# EAGLE board P1001-001-003-320 - Controller (EAGLE 9.4.2), part 1 of 4
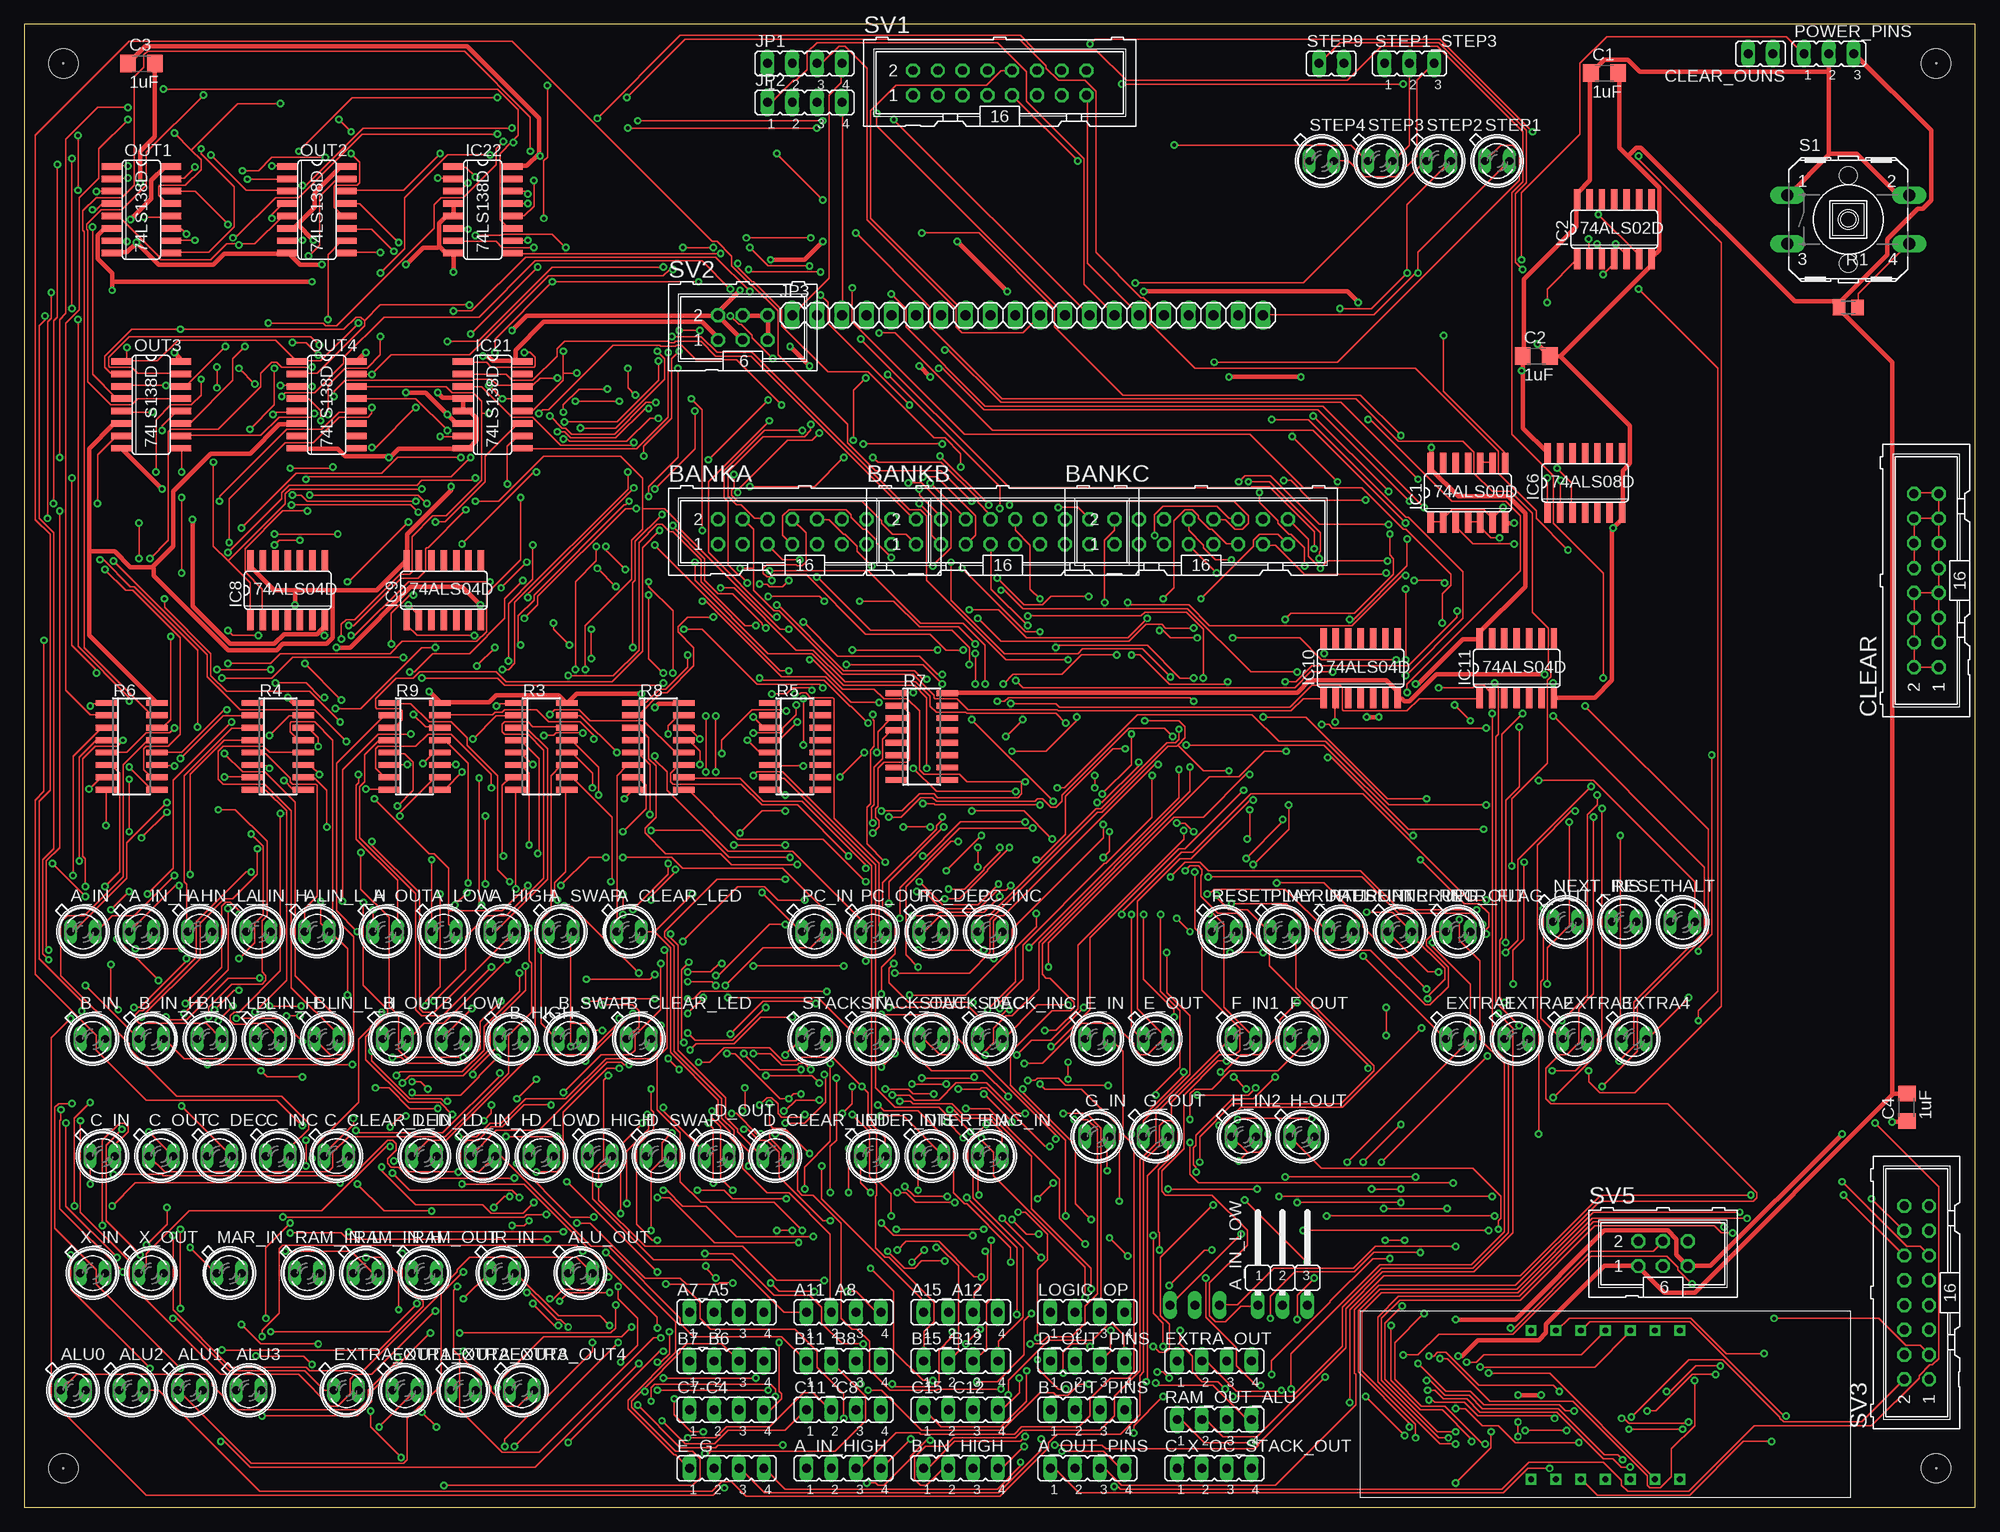
[diagram p0: board, top side]
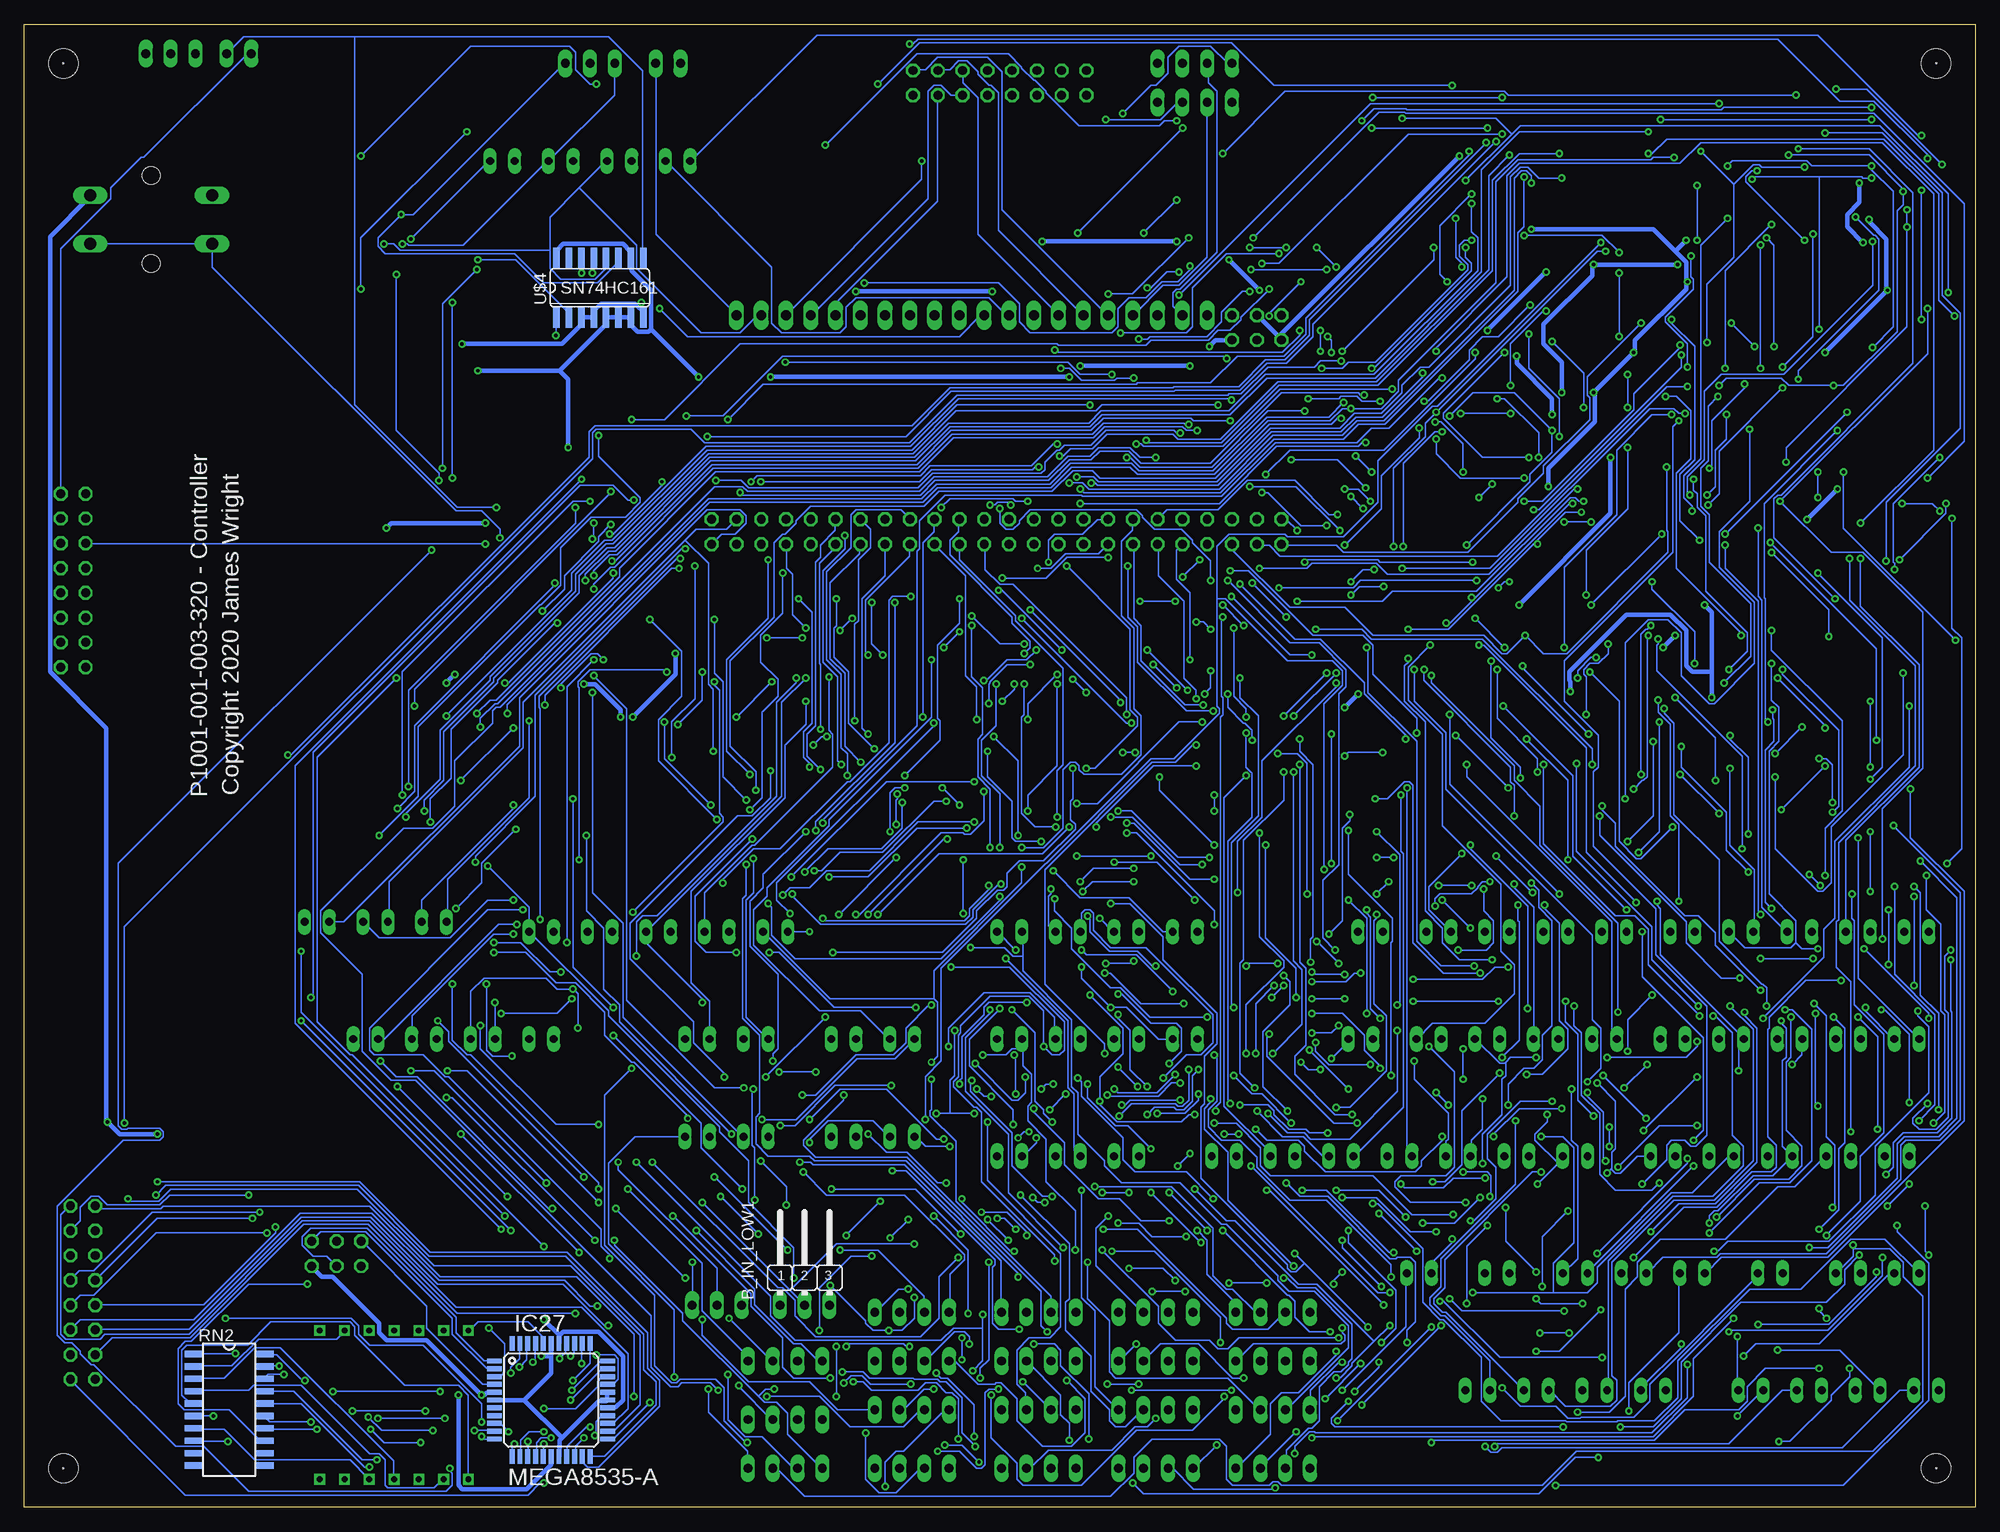
[diagram p1: board, bottom side, seen from below]

Size 200 x 152 mm. Coordinates in mm from the lower left corner, seen from the top.
Outline: 0,0 200,0 200,152 0,152 0,0
Copper layers (1*16): Top 0.035mm / dielectric 1.5mm / Bottom 0.035mm
Design rules "default *": minimum track width 6mil, minimum drill 0.35mm, track to track 6mil, track to pad 6mil, pad to pad 6mil, via to via 6mil, smd to smd 6mil, copper to edge 40mil, drill to drill 6mil, minimum pad ring 10mil, minimum via ring 8mil, stop-mask expansion 4mil, vias tented up to drill 0mil, thermal gap 10mil
Net classes: 1 power: width 0.457 mm
Holes 0.12 mm at 4,4 196,148 4,148 196,4
Holes 3 mm at 4,148 4,4 196,4 196,148

## Footprints (pad centres in the part's own frame; a part is rotated, then mirrored left to right if it is on the bottom)
JP4 = drill 0.914 long: 1 -3.81,0; 2 -1.27,0; 3 1.27,0; 4 3.81,0
SFH482 = drill 0.813 long: A -1.27,0; K 1.27,0
JP2W = drill 0.914 long: 1 -2.54,-1.27; 2 0,-1.27; 3 2.54,-1.27
ML16 = drill 0.914 octagon: 1 -8.89,-1.27; 2 -8.89,1.27; 3 -6.35,-1.27; 4 -6.35,1.27; 5 -3.81,-1.27; 6 -3.81,1.27; 7 -1.27,-1.27; 8 -1.27,1.27; 9 1.27,-1.27; 10 1.27,1.27; 11 3.81,-1.27; 12 3.81,1.27; 13 6.35,-1.27; 14 6.35,1.27; 15 8.89,-1.27; 16 8.89,1.27
C1206 = smd 1.6 x 1.8: 1 -1.4,0; 2 1.4,0
JP1 = drill 0.914 long: 1 0,-1.27; 2 0,1.27
SO14 = smd 0.66 x 2.032: 1 -3.81,-3.073; 2 -2.54,-3.073; 3 -1.27,-3.073; 4 0,-3.073; 5 1.27,-3.073; 6 2.54,-3.073; 7 3.81,-3.073; 8 3.81,3.073; 9 2.54,3.073; 10 1.27,3.073; 11 0,3.073; 12 -1.27,3.073; 13 -2.54,3.073; 14 -3.81,3.073
SO16 = smd 0.66 x 2.032: 1 -4.445,-3.073; 2 -3.175,-3.073; 3 -1.905,-3.073; 4 -0.635,-3.073; 5 0.635,-3.073; 6 1.905,-3.073; 7 3.175,-3.073; 8 4.445,-3.073; 9 4.445,3.073; 10 3.175,3.073; 11 1.905,3.073; 12 0.635,3.073; 13 -0.635,3.073; 14 -1.905,3.073; 15 -3.175,3.073; 16 -4.445,3.073
TQFP44 = smd 1.5 x 0.5: 1 -5.8,4; 2 -5.8,3.2; 3 -5.8,2.4; 4 -5.8,1.6; 5 -5.8,0.8; 6 -5.8,0; 7 -5.8,-0.8; 8 -5.8,-1.6; 9 -5.8,-2.4; 10 -5.8,-3.2; 11 -5.8,-4; 23 5.8,-4; 24 5.8,-3.2; 25 5.8,-2.4; 26 5.8,-1.6; 27 5.8,-0.8; 28 5.8,0; 29 5.8,0.8; 30 5.8,1.6; 31 5.8,2.4; 32 5.8,3.2; 33 5.8,4 | smd 0.5 x 1.5: 12 -4,-5.8; 13 -3.2,-5.8; 14 -2.4,-5.8; 15 -1.6,-5.8; 16 -0.8,-5.8; 17 0,-5.8; 18 0.8,-5.8; 19 1.6,-5.8; 20 2.4,-5.8; 21 3.2,-5.8; 22 4,-5.8; 34 4,5.8; 35 3.2,5.8; 36 2.4,5.8; 37 1.6,5.8; 38 0.8,5.8; 39 0,5.8; 40 -0.8,5.8; 41 -1.6,5.8; 42 -2.4,5.8; 43 -3.2,5.8; 44 -4,5.8
1X20 = drill 1.016 long: 1 -24.13,0; 2 -21.59,0; 3 -19.05,0; 4 -16.51,0; 5 -13.97,0; 6 -11.43,0; 7 -8.89,0; 8 -6.35,0; 9 -3.81,0; 10 -1.27,0; 11 1.27,0; 12 3.81,0; 13 6.35,0; 14 8.89,0; 15 11.43,0; 16 13.97,0; 17 16.51,0; 18 19.05,0; 19 21.59,0; 20 24.13,0
JP2 = drill 0.914 long: 1 -2.54,0; 2 0,0; 3 2.54,0
M0805 = smd 1.3 x 1.6: 1 -0.95,0; 2 0.95,0
SO16' = smd 0.6 x 2.2: 1 -4.445,-2.6; 2 -3.175,-2.6; 3 -1.905,-2.6; 4 -0.635,-2.6; 5 0.635,-2.6; 6 1.905,-2.6; 7 3.175,-2.6; 8 4.445,-2.6; 9 4.445,2.6; 10 3.175,2.6; 11 1.905,2.6; 12 0.635,2.6; 13 -0.635,2.6; 14 -1.905,2.6; 15 -3.175,2.6; 16 -4.445,2.6
SOMC20 = smd 1.91 x 0.64: 1 -3.62,5.715; 2 -3.62,4.445; 3 -3.62,3.175; 4 -3.62,1.905; 5 -3.62,0.635; 6 -3.62,-0.635; 7 -3.62,-1.905; 8 -3.62,-3.175; 9 -3.62,-4.445; 10 -3.62,-5.715; 11 3.62,-5.715; 12 3.62,-4.445; 13 3.62,-3.175; 14 3.62,-1.905; 15 3.62,-0.635; 16 3.62,0.635; 17 3.62,1.905; 18 3.62,3.175; 19 3.62,4.445; 20 3.62,5.715
B3F-40XX = drill 1.194 long: 1 -6.248,2.489; 2 6.248,2.489; 3 -6.248,-2.489; 4 6.248,-2.489 | hole 1.803: 0,-4.496; 0,4.496
ML6 = drill 0.914 octagon: 1 -2.54,-1.27; 2 -2.54,1.27; 3 0,-1.27; 4 0,1.27; 5 2.54,-1.27; 6 2.54,1.27
4-DIGIT-7-SEGMENT = drill 0.6 square: PIN1 17.48,1.88; PIN2 20.02,1.88; PIN3 22.56,1.88; PIN4 25.1,1.88; PIN5 27.64,1.88; PIN6 30.18,1.88; PIN7 32.72,1.88; PIN8 32.72,17.12; PIN9 30.18,17.12; PIN10 27.64,17.12; PIN11 25.1,17.12; PIN12 22.56,17.12; PIN13 20.02,17.12; PIN14 17.48,17.12

## Placement (x,y rotation side)
A7_A5  [JP4]  72,20 0 top
A11_A8  [JP4]  84,20 0 top
A15_A12  [JP4]  96,20 0 top
A_CLEAR_LED  [SFH482]  62,59 0 top
A_HIGH  [SFH482]  49,59 0 top
A_IN  [SFH482]  6,59 0 top
A_IN_H_H  [SFH482]  12,59 0 top
A_IN_H_L  [SFH482]  24,59 0 top
A_IN_HIGH  [JP4]  84,4 0 top
A_IN_L_H  [SFH482]  30,59 0 top
A_IN_L_L  [SFH482]  18,59 0 top
A_IN_LOW  [JP2W]  129,22 0 top
A_LOW  [SFH482]  43,59 0 top
A_OUT  [SFH482]  37,59 0 top
A_OUT_PINS  [JP4]  109,4 0 top
A_SWAP  [SFH482]  55,59 0 top
ALU0  [SFH482]  5,12 0 top
ALU1  [SFH482]  17,12 0 top
ALU2  [SFH482]  11,12 0 top
ALU3  [SFH482]  23,12 0 top
ALU_OUT  [SFH482]  57,24 0 top
B7_B6  [JP4]  72,15 0 top
B11_B8  [JP4]  84,15 0 top
B15_B12  [JP4]  96,15 0 top
B_CLEAR_LED  [SFH482]  63,48 0 top
B_HIGH  [SFH482]  50,48 0 top
B_IN  [SFH482]  7,48 0 top
B_IN_H_H  [SFH482]  13,48 0 top
B_IN_H_L  [SFH482]  25,48 0 top
B_IN_HIGH  [JP4]  96,4 0 top
B_IN_L_H  [SFH482]  31,48 0 top
B_IN_L_L  [SFH482]  19,48 0 top
B_IN_LOW1  [JP2W]  120,22 0 bottom
B_LOW  [SFH482]  44,48 0 top
B_OUT  [SFH482]  38,48 0 top
B_OUT_PINS  [JP4]  109,10 0 top
B_SWAP  [SFH482]  56,48 0 top
BANKA  [ML16]  80,100 0 top
BANKB  [ML16]  100.32,100 0 top
BANKC  [ML16]  120.64,100 0 top
C1  1uF  [C1206]  162,147 0 top
C2  1uF  [C1206]  155,118 0 top
C3  1uF  [C1206]  12,148 0 top
C4  1uF  [C1206]  193,41 90 top
C7-C4  [JP4]  72,10 0 top
C11_C8  [JP4]  84,10 0 top
C15_C12  [JP4]  96,10 0 top
C_CLEAR_LED  [SFH482]  32,36 0 top
C_DEC  [SFH482]  20,36 0 top
C_IN  [SFH482]  8,36 0 top
C_INC  [SFH482]  26,36 0 top
C_OUT  [SFH482]  14,36 0 top
C_X_OC_STACK_OUT  [JP4]  122,4 0 top
CLEAR  [ML16]  195,95 90 top
CLEAR_OUNS  [JP1]  178,149 90 top
D_CLEAR_LED  [SFH482]  77,36 0 top
D_HIGH  [SFH482]  59,36 0 top
D_IN_H  [SFH482]  47,36 0 top
D_IN_L  [SFH482]  41,36 0 top
D_LOW  [SFH482]  53,36 0 top
D_OUT  [SFH482]  71,36 0 top
D_OUT_PINS  [JP4]  109,15 0 top
D_SWAP  [SFH482]  65,36 0 top
E_G  [JP4]  72,4 0 top
E_IN  [SFH482]  110,48 0 top
E_OUT  [SFH482]  116,48 0 top
EXTRA1  [SFH482]  147,48 0 top
EXTRA2  [SFH482]  153,48 0 top
EXTRA3  [SFH482]  159,48 0 top
EXTRA4  [SFH482]  165,48 0 top
EXTRA_OUT  [JP4]  122,15 0 top
EXTRA_OUT1  [SFH482]  33,12 0 top
EXTRA_OUT2  [SFH482]  39,12 0 top
EXTRA_OUT3  [SFH482]  45,12 0 top
EXTRA_OUT4  [SFH482]  51,12 0 top
F_IN1  [SFH482]  125,48 0 top
F_OUT  [SFH482]  131,48 0 top
FLAG_IN  [SFH482]  99,36 0 top
G_IN  [SFH482]  110,38 0 top
G_OUT  [SFH482]  116,38 0 top
H-OUT  [SFH482]  131,38 0 top
H_IN2  [SFH482]  125,38 0 top
HALT  [SFH482]  170,60 0 top
IC1  74ALS00D  [SO14]  148,104 0 top
IC2  74ALS02D  [SO14]  163,131 0 top
IC6  74ALS08D  [SO14]  160,105 0 top
IC8  74ALS04D  [SO14]  27,94 0 top
IC9  74ALS04D  [SO14]  43,94 0 top
IC10  74ALS04D  [SO14]  137,86 0 top
IC11  74ALS04D  [SO14]  153,86 0 top
IC21  74LS138D  [SO16]  48,113 270 top
IC22  74LS138D  [SO16]  47,133 270 top
IC27  MEGA8535-A  [TQFP44]  146,11 0 bottom
INTER_DIS  [SFH482]  87,36 0 top
INTER_EN  [SFH482]  93,36 0 top
INTR_FLAG_OUT  [SFH482]  147,59 0 top
INTR_REG_OUT  [SFH482]  141,59 0 top
IR_IN  [SFH482]  49,24 0 top
JP1  [JP4]  80,148 0 top
JP2  [JP4]  80,144 0 top
JP3  [1X20]  102.86,122.19 0 top
LOGIC_OP  [JP4]  109,20 0 top
MAR_IN  [SFH482]  21,24 0 top
NEXT_INS  [SFH482]  158,60 0 top
OUT1  74LS138D  [SO16]  12,133 270 top
OUT2  74LS138D  [SO16]  30,133 270 top
OUT3  74LS138D  [SO16]  13,113 270 top
OUT4  74LS138D  [SO16]  31,113 270 top
PAUSE_INERUPT  [SFH482]  135,59 0 top
PC_DEC  [SFH482]  93,59 0 top
PC_IN  [SFH482]  81,59 0 top
PC_INC  [SFH482]  99,59 0 top
PC_OUT  [SFH482]  87,59 0 top
PLAY_INTERUPT  [SFH482]  129,59 0 top
POWER_PINS  [JP2]  185,149 0 top
R1  [M0805]  187,123 0 top
R3  [SO16']  53,78 270 top
R4  [SO16']  26,78 270 top
R5  [SO16']  79,78 270 top
R6  [SO16']  11,78 270 top
R7  [SO16']  92,79 270 top
R8  [SO16']  65,78 270 top
R9  [SO16']  40,78 270 top
RAM_IN_H  [SFH482]  35,24 0 top
RAM_IN_L  [SFH482]  29,24 0 top
RAM_OUT  [SFH482]  41,24 0 top
RAM_OUT_ALU  [JP4]  122,9 0 top
RESET  [SFH482]  164,60 0 top
RESET_INERUPT1  [SFH482]  123,59 0 top
RN2  [SOMC20]  179,10 0 bottom
S1  [B3F-40XX]  187,132 0 top
STACK_DEC  [SFH482]  93,48 0 top
STACK_IN  [SFH482]  81,48 0 top
STACK_INC  [SFH482]  99,48 0 top
STACK_OUT  [SFH482]  87,48 0 top
STEP1  [SFH482]  151,138 0 top
STEP1_STEP3  [JP2]  142,148 0 top
STEP2  [SFH482]  145,138 0 top
STEP3  [SFH482]  139,138 0 top
STEP4  [SFH482]  133,138 0 top
STEP9  [JP1]  134,148 270 top
SV1  [ML16]  100,146 0 top
SV2  [ML6]  73.65,120.92 0 top
SV3  [ML16]  194,22 90 top
SV5  [ML6]  168,26 0 top
U$1  4-DIGIT-7-SEGMENT  [4-DIGIT-7-SEGMENT]  137,1 0 top
U$4  SN74HC161  [SO16]  141,125 0 bottom
X_IN  [SFH482]  7,24 0 top
X_OUT  [SFH482]  13,24 0 top

## Library data of the parts
A7_A5 A11_A8 A15_A12 A_IN_HIGH A_IN_LOW A_OUT_PINS B7_B6 B11_B8 B15_B12 B_IN_HIGH B_IN_LOW1 B_OUT_PINS C7-C4 C11_C8 C15_C12 C_X_OC_STACK_OUT CLEAR_OUNS D_OUT_PINS E_G EXTRA_OUT JP1 JP2 LOGIC_OP POWER_PINS RAM_OUT_ALU STEP1_STEP3 STEP9 = jumper
A_CLEAR_LED A_HIGH A_IN A_IN_H_H A_IN_H_L A_IN_L_H A_IN_L_L A_LOW A_OUT A_SWAP ALU0 ALU1-ALU3 ALU_OUT B_CLEAR_LED B_HIGH B_IN B_IN_H_H B_IN_H_L B_IN_L_H B_IN_L_L B_LOW B_OUT B_SWAP C_CLEAR_LED C_DEC C_IN C_INC C_OUT D_CLEAR_LED D_HIGH D_IN_H D_IN_L D_LOW D_OUT D_SWAP E_IN E_OUT EXTRA1-EXTRA4 EXTRA_OUT1-EXTRA_OUT4 F_IN1 F_OUT FLAG_IN G_IN G_OUT H-OUT H_IN2 HALT INTER_DIS INTER_EN INTR_FLAG_OUT INTR_REG_OUT IR_IN MAR_IN NEXT_INS PAUSE_INERUPT PC_DEC PC_IN PC_INC PC_OUT PLAY_INTERUPT RAM_IN_H RAM_IN_L RAM_OUT RESET RESET_INERUPT1 STACK_DEC STACK_IN STACK_INC STACK_OUT STEP1-STEP4 X_IN X_OUT = led
BANKA BANKB BANKC CLEAR SV1-SV3 SV5 = con-harting-ml; OC_FARNELL: unknown; OC_NEWARK: unknown
C1-C4 = rcl; SPICEPREFIX: C
IC1 IC2 IC6 IC8-IC11 IC21 IC22 OUT1-OUT4 = 74xx-us
IC27 = atmel; MPN: ATMEGA8535-16AU; OC_FARNELL: 1528437; OC_NEWARK: 01M6908
JP3 = pinhead
R1 = rcl; SPICEPREFIX: R
R3-R9 = resistor-bourns; OC_FARNELL: unknown; OC_NEWARK: unknown
RN2 = resistor-dil; OC_FARNELL: unknown; OC_NEWARK: unknown
S1 = switch-omron; MF: OMRON COMPONENTS USA; MPN: B3F-4000; OC_FARNELL: 176434; OC_NEWARK: 36K3105
U$1 = ADAFRUIT
U$4 = 16bit

## Nets
!CLEAR: CLEAR_OUNS.1 IC1.1 IC1.2 IC1.6 U$4.9
A: IC27.37 RN2.20
B: IC27.36 RN2.19
C: IC27.35 RN2.18
CLEAR: CLEAR.1 CLEAR.2 CLEAR.3 CLEAR.4 CLEAR.5 CLEAR.6 CLEAR.7 CLEAR.8 CLEAR.9 CLEAR.10 CLEAR.11 CLEAR.12 CLEAR.13 CLEAR.14 CLEAR.15 CLEAR.16 CLEAR_OUNS.2 IC1.3
CLK: POWER_PINS.1 U$4.2
D: IC27.34 RN2.17
DATAA0: BANKA.1 OUT1.1 OUT2.1 OUT3.1 OUT4.1
DATAA1: BANKA.2 OUT1.2 OUT2.2 OUT3.2 OUT4.2
DATAA2: BANKA.3 OUT1.3 OUT2.3 OUT3.3 OUT4.3
DATAA3: BANKA.4 IC8.1 IC10.1 OUT1.4 OUT3.4
DATAA4: BANKA.5 IC9.1 IC11.1 OUT1.5 OUT2.5
DATAA5: A7_A5.2 BANKA.6 EXTRA1.K
DATAA6: A7_A5.3 BANKA.7 EXTRA2.K
DATAA7: A7_A5.4 BANKA.8 EXTRA3.K
DATAA8: A11_A8.1 BANKA.9 EXTRA4.A
DATAA9: A11_A8.2 A_CLEAR_LED.K BANKA.10
DATAA10: A11_A8.3 B_CLEAR_LED.K BANKA.11
DATAA11: A11_A8.4 BANKA.12 C_CLEAR_LED.K
DATAA12: A15_A12.1 BANKA.13 D_CLEAR_LED.K
DATAA13: A15_A12.2 BANKA.14 RESET_INERUPT1.K
DATAA14: A15_A12.3 BANKA.15 PAUSE_INERUPT.K
DATAA15: A15_A12.4 BANKA.16 PLAY_INTERUPT.K
DATAB0: BANKB.1 IC21.1
DATAB1: BANKB.2 IC21.2
DATAB2: BANKB.3 IC21.3
DATAB3: BANKB.4 IC22.1
DATAB4: BANKB.5 IC22.2
DATAB5: BANKB.6 IC22.3
DATAB6: B7_B6.3 BANKB.7 C_IN.K
DATAB7: B7_B6.4 BANKB.8 D_IN_L.K
DATAB8: B11_B8.1 BANKB.9 D_IN_H.K
DATAB9: B11_B8.2 BANKB.10 X_IN.K
DATAB10: B11_B8.3 BANKB.11 IR_IN.K
DATAB11: B11_B8.4 BANKB.12 MAR_IN.K
DATAB12: B15_B12.1 BANKB.13 PC_IN.K
DATAB13: B15_B12.2 BANKB.14 STACK_IN.K
DATAB14: B15_B12.3 BANKB.15 RAM_IN_L.K
DATAB15: B15_B12.4 BANKB.16 RAM_IN_H.K
DATAC0: ALU0.K BANKC.1 LOGIC_OP.4
DATAC1: ALU1.K BANKC.2 LOGIC_OP.3
DATAC2: ALU2.K BANKC.3 LOGIC_OP.2
DATAC3: ALU3.K BANKC.4 LOGIC_OP.1
DATAC4: BANKC.5 C7-C4.1 PC_DEC.A
DATAC5: BANKC.6 C7-C4.2 PC_INC.A
DATAC6: BANKC.7 C7-C4.3 STACK_INC.A
DATAC7: BANKC.8 C7-C4.4 STACK_DEC.A
DATAC8: BANKC.9 C11_C8.1 C_INC.A
DATAC9: BANKC.10 C11_C8.2 C_DEC.A
DATAC10: BANKC.11 C11_C8.3 FLAG_IN.A
DATAC11: BANKC.12 C11_C8.4 INTER_EN.A
DATAC12: BANKC.13 C15_C12.1 INTER_DIS.A
DATAC13: BANKC.14 C15_C12.2 RESET.A
DATAC14: BANKC.15 C15_C12.3 HALT.A
DATAC15: BANKC.16 C15_C12.4 NEXT_INS.A
DIG0: IC27.40 U$1.PIN14
DIG1: IC27.41 U$1.PIN11
DIG2: IC27.42 U$1.PIN10
DIG3: IC27.43 U$1.PIN6
DP: IC27.30 RN2.13
E: IC27.33 RN2.16
EXTERN_BUS0: IC27.9 SV3.1
EXTERN_BUS1: IC27.10 SV3.2
EXTERN_BUS2: IC27.11 SV3.3
EXTERN_BUS3: IC27.12 SV3.4
EXTERN_BUS4: IC27.13 SV3.5
EXTERN_BUS5: IC27.14 SV3.6
EXTERN_BUS6: IC27.15 SV3.7
EXTERN_BUS7: IC27.16 SV3.8
EXTERN_BUS8: IC27.19 SV3.9
EXTERN_BUS9: IC27.20 SV3.10
EXTERN_BUS10: IC27.21 SV3.11
EXTERN_BUS11: IC27.22 SV3.12
EXTERN_BUS12: IC27.23 SV3.13
EXTERN_BUS13: IC27.24 SV3.14
EXTERN_BUS14: IC27.25 SV3.15
EXTERN_BUS15: IC27.26 SV3.16
F: IC27.32 RN2.15
FIRST_STEP: IC6.3 STEP9.1
G: IC27.31 RN2.14
GND [power]: C1.2 C2.2 C3.2 C4.2 IC1.7 IC2.7 IC6.7 IC8.7 IC9.7 IC10.7 IC11.7 IC21.4 IC21.5 IC21.8 IC22.4 IC22.5 IC22.8 IC27.6 IC27.18 IC27.28 IC27.29 IC27.39 OUT1.8 OUT2.8 OUT3.8 OUT4.8 POWER_PINS.3 R1.1 R7.16 SV2.2 SV2.3 SV5.1 U$4.3 U$4.4 U$4.8
IN_BUS0: IC2.2 JP3.20 STEP1.K STEP9.2 U$4.14
IN_BUS1: IC2.3 JP3.10 STEP1_STEP3.1 STEP2.K U$4.13
IN_BUS2: IC2.5 JP3.19 STEP1_STEP3.2 STEP3.K U$4.12
IN_BUS3: IC2.6 JP3.9 STEP1_STEP3.3 STEP4.K U$4.11
IN_BUS4: JP3.18 SV1.9
IN_BUS5: JP3.8 SV1.10
IN_BUS6: JP3.17 SV1.11
IN_BUS7: JP3.7 SV1.12
IN_BUS8: JP3.16 SV1.13
IN_BUS9: JP3.6 SV1.14
IN_BUS10: JP3.15 SV1.15
IN_BUS11: JP3.5 SV1.16
IN_BUS12: JP2.1 JP3.14
IN_BUS13: JP2.2 JP3.4
IN_BUS14: JP2.3 JP3.13
IN_BUS15: JP2.4 JP3.3
IN_BUS16: JP1.1 JP3.12
IN_BUS17: JP1.2 JP3.2
IN_BUS18: JP1.3 JP3.11
IN_BUS19: JP1.4 JP3.1
N$1: IC1.4 IC1.5 R1.2 S1.3 S1.4
N$2: EXTRA1.A R8.1
N$3: EXTRA2.A R8.2
N$4: R8.13 X_IN.A
N$5: EXTRA4.K R5.3
N$6: EXTRA3.A R8.3
N$7: A_CLEAR_LED.A R8.6
N$8: C_CLEAR_LED.A R8.8
N$9: B_CLEAR_LED.A R8.7
N$10: R8.9 RESET_INERUPT1.A
N$11: PAUSE_INERUPT.A R8.10
N$12: PLAY_INTERUPT.A R8.11
N$13: C_IN.A R8.12
N$14: D_IN_L.A R8.15
N$15: D_IN_H.A R8.14
N$16: PC_DEC.K R6.2
N$17: PC_INC.K R6.1
N$18: R6.8 RAM_IN_H.A
N$19: R6.7 RAM_IN_L.A
N$20: R6.6 STACK_IN.A
N$21: PC_IN.A R6.5
N$22: MAR_IN.A R6.4
N$23: IR_IN.A R6.3
N$24: INTER_DIS.K R5.7
N$25: R6.15 STACK_INC.K
N$26: R6.14 STACK_DEC.K
N$27: C_INC.K R6.13
N$28: C_DEC.K R6.12
N$29: INTER_EN.K R5.8
N$30: FLAG_IN.K R6.11
N$31: A_IN.K A_IN_LOW.1 IC21.14
N$32: A_IN_L_L.K A_IN_LOW.2 IC21.13
N$33: A_IN_H_H.K A_IN_LOW.3 IC21.12
N$34: A_IN_HIGH.1 A_IN_L_H.K IC21.11
N$35: A_IN_H_L.K A_IN_HIGH.2 IC21.10
N$36: A_IN_HIGH.3 E_IN.K IC21.9
N$38: A_IN_HIGH.4 G_IN.K IC21.7
N$39: G_IN.A R4.8
N$40: E_IN.A R4.7
N$41: A_IN_H_L.A R4.6
N$42: D_CLEAR_LED.A R8.5
N$43: IC1.8 U$4.1
N$44: B_IN_HIGH.1 H_IN2.A IC22.7
N$45: B_IN_HIGH.2 F_IN1.A IC22.9
N$46: B_IN_H_L.A B_IN_HIGH.3 IC22.10
N$47: B_IN_HIGH.4 B_IN_L_H.A IC22.11
N$48: B_IN_H_H.A B_IN_LOW1.1 IC22.12
N$49: B_IN_L_L.A B_IN_LOW1.2 IC22.13
N$50: A_OUT.K A_OUT_PINS.1 OUT1.15
N$51: B_IN.A B_IN_LOW1.3 IC22.14
N$52: H_IN2.K R4.9
N$53: F_IN1.K R4.10
N$54: B_IN_H_L.K R4.11
N$55: R9.14 STEP2.A
N$56: A_LOW.K A_OUT_PINS.2 OUT1.14
N$57: A_HIGH.K A_OUT_PINS.3 OUT1.13
N$58: A_OUT_PINS.4 A_SWAP.K OUT1.12
N$59: R5.6 RESET.K
N$60: HALT.K R5.5
N$61: IC2.4 IC6.2
N$62: IC2.1 IC6.1
N$63: NEXT_INS.K R5.4
N$64: A_IN_L_H.A R4.5
N$65: A_IN_H_H.A R4.4
N$66: A_IN_L_L.A R4.3
N$67: ALU0.A R7.4
N$68: ALU1.A R7.3
N$69: ALU2.A R7.1
N$70: ALU3.A R7.2
N$71: A_IN.A R4.2
N$72: IC22.15
N$73: B_IN_L_H.K R4.12
N$74: B_IN_H_H.K R4.13
N$75: B_OUT.K B_OUT_PINS.1 OUT1.11
N$76: B_LOW.K B_OUT_PINS.2 OUT1.10
N$77: B_HIGH.K B_OUT_PINS.3 OUT1.9
N$78: B_OUT_PINS.4 B_SWAP.K OUT1.7
N$79: C_OUT.K D_OUT_PINS.4 OUT2.15
N$80: D_OUT.K D_OUT_PINS.3 OUT2.14
N$81: D_LOW.K D_OUT_PINS.2 OUT2.13
N$82: D_HIGH.K D_OUT_PINS.1 OUT2.12
N$83: C_X_OC_STACK_OUT.4 D_SWAP.K OUT2.11
N$84: C_X_OC_STACK_OUT.3 OUT2.10 X_OUT.K
N$85: C_X_OC_STACK_OUT.2 OUT2.9 PC_OUT.K
N$86: C_X_OC_STACK_OUT.1 OUT2.7 STACK_OUT.K
N$87: C_OUT.A R3.9
N$88: D_OUT.A R3.10
N$89: B_SWAP.A R3.8
N$90: B_HIGH.A R3.7
N$91: B_LOW.A R3.6
N$92: B_OUT.A R3.5
N$93: A_SWAP.A R3.4
N$94: A_HIGH.A R3.3
N$95: A_LOW.A R3.2
N$96: A_OUT.A R3.1
N$97: D_LOW.A R3.11
N$98: D_HIGH.A R3.12
N$99: PC_OUT.A R3.15
N$100: D_SWAP.A R3.13
N$101: R3.14 X_OUT.A
N$102: OUT3.15 RAM_OUT.K RAM_OUT_ALU.1
N$103: INTR_REG_OUT.K OUT3.14 RAM_OUT_ALU.2
N$104: INTR_FLAG_OUT.K OUT3.13 RAM_OUT_ALU.3
N$105: ALU_OUT.K OUT3.12 RAM_OUT_ALU.4
N$106: E_G.1 E_OUT.K OUT3.11
N$107: E_G.2 F_OUT.K OUT3.10
N$108: E_G.3 G_OUT.K OUT3.9
N$109: E_G.4 H-OUT.K OUT3.7
N$110: R9.1 STACK_OUT.A
N$111: R9.2 RAM_OUT.A
N$112: G_OUT.A R9.8
N$113: H-OUT.A R9.9
N$114: EXTRA_OUT1.A R9.10
N$115: EXTRA_OUT2.A R9.11
N$116: INTR_REG_OUT.A R9.3
N$117: INTR_FLAG_OUT.A R9.4
N$118: ALU_OUT.A R9.5
N$119: IC27.1 SV5.3
N$120: IC27.3 SV5.4
N$121: IC27.2 SV5.6
N$122: IC27.4 SV5.2
N$123: RN2.1 U$1.PIN13
N$124: RN2.2 U$1.PIN9
N$125: RN2.3 U$1.PIN4
N$126: RN2.4 U$1.PIN2
N$127: RN2.5 U$1.PIN1
N$128: RN2.6 U$1.PIN12
N$129: RN2.7 U$1.PIN5
N$130: RN2.8 U$1.PIN3
N$131: R9.15 STEP1.A
N$132: B_IN_L_L.K R4.14
N$133: R6.10 STEP3.A
N$134: R6.9 STEP4.A
N$135: B_IN.K R4.15
N$136: E_OUT.A R9.6
N$137: F_OUT.A R9.7
N$138: EXTRA_OUT3.A R9.12
N$139: EXTRA_OUT4.A R9.13
N$140: EXTRA_OUT1.K EXTRA_OUT.4 OUT4.15
N$141: EXTRA_OUT2.K EXTRA_OUT.3 OUT4.14
N$142: EXTRA_OUT3.K EXTRA_OUT.2 OUT4.13
N$143: EXTRA_OUT4.K EXTRA_OUT.1 OUT4.12
N$144: IC8.2 OUT2.4
N$145: IC9.2 OUT3.5
N$146: IC10.2 OUT4.4
N$147: IC11.2 OUT4.5
NEXT_INS: IC1.9 IC1.10
VCC [power]: C1.1 C2.1 C3.1 C4.1 IC1.14 IC2.14 IC6.14 IC8.14 IC9.14 IC10.14 IC11.14 IC21.6 IC21.16 IC22.6 IC22.16 IC27.5 IC27.17 IC27.27 IC27.38 OUT1.6 OUT1.16 OUT2.6 OUT2.16 OUT3.6 OUT3.16 OUT4.6 OUT4.16 POWER_PINS.2 R3.16 R4.16 R6.16 R8.16 R9.16 S1.1 S1.2 SV2.1 SV2.4 SV2.5 SV2.6 SV5.5 U$4.5 U$4.6 U$4.7 U$4.10 U$4.16

## Tracks (layer width: path | path; a pad name or v marks a point on that pad's centre or on a via)
!CLEAR  (via drill 0.35)
  Top 0.152: IC1.1 144.25,101 145.38,101 IC1.2 145.5,101 145.5,101.38 146.38,102.25 149.62,102.25 150.5,101.38 | 150.5,101.38 150.5,101 IC1.6 150.5,101.38 | v151.62,102.5 150.5,101.38
  Bottom 0.152: 166.12,150.75 177.5,150.75 179.25,149 CLEAR_OUNS.1 | 166.12,150.75 140.12,150.75 136.62,147.25 136.62,128.12 U$4.9 | v151.62,102.5 155.62,102.5 166.12,113 166.12,150.75
A  (via drill 0.35)
  Top 0.152: v145.12,15.25 145.88,15.25 150.25,10.88 158.75,10.88 166.38,3.25 166.38,2.25 166.62,2 167.75,2 168.88,3.12 168.88,6 171.25,8.38 v171.25,13
  Bottom 0.152: v145.12,15.25 144.5,15.88 144.5,16.75 IC27.37 | v171.25,13 171.5,13 174.12,15.62 175.38,15.62 RN2.20
B  (via drill 0.35)
  Top 0.152: v144,15.5 144.5,15.5 144.88,15.88 145.75,15.88 149.12,12.5 156.75,12.5 v157.38,11.88 | v168.38,11.88 168.75,11.88 171.38,14.5 v173.88,14.5
  Bottom 0.152: v144,15.5 143.62,15.88 143.62,16.75 IC27.36 | v168.38,11.88 v157.38,11.88 | v173.88,14.5 175.38,14.5 RN2.19
C  (via drill 0.35)
  Top 0.152: v142.88,14.75 145.75,11.88 148.25,11.88 149.62,10.5 157.38,10.5 158,9.88 v158.88,9.88 | v166.38,9.88 167.25,9.88 171,13.62 v173.38,13.62
  Bottom 0.152: v142.88,14.75 142.88,16.75 IC27.35 | v166.38,9.88 v158.88,9.88 | v173.38,13.62 175,13.62 175.38,13.25 RN2.18
CLEAR  (via drill 0.35)
  Top 0.152: CLEAR.3 196.25,88.75 196.25,91.12 CLEAR.5 196.25,91.25 196.25,93.62 CLEAR.7 196.25,93.75 | 193.75,86.12 193.75,88.62 CLEAR.4 193.75,88.75 193.75,91.12 CLEAR.6 193.75,91.25 193.75,93.62 CLEAR.8 193.75,93.75 196.25,93.75 | 193.75,86.12 196.25,86.12 CLEAR.1 | 193.75,86.12 CLEAR.2 | v152.75,98.75 148.5,98.75 146.75,100.5 146.75,100.88 IC1.3 | CLEAR.10 193.75,96.38 193.75,98.75 CLEAR.12 193.75,98.88 193.75,101.25 CLEAR.14 193.75,101.38 196.25,101.38 | 196.25,93.75 196.25,96.25 CLEAR.9 196.25,96.38 196.25,98.75 CLEAR.11 196.25,98.88 196.25,101.25 CLEAR.13 196.25,101.38 | CLEAR.16 193.75,104 196.25,104 CLEAR.15 196.25,103.88 196.25,101.38
  Bottom 0.152: v152.75,98.75 193.62,98.75 CLEAR.12 | CLEAR_OUNS.2 177.12,149 187.75,138.38 188,138.38 191.12,135.25 191.12,134.12 196.25,129 196.25,104 CLEAR.15
CLK  (via drill 0.35)
  Top 0.152: v153.5,127.88 153.5,134.75 159.5,140.75 159.5,148 162.25,150.75 180.62,150.75 182.38,149 POWER_PINS.1
  Bottom 0.152: v153.5,127.88 149.62,127.88 144.25,122.5 144.25,122 U$4.2
D  (via drill 0.35)
  Top 0.152: v143.75,13 144.12,13 145.62,11.5 148.12,11.5 149.5,10.12 157.25,10.12 162,5.38 163.38,5.38 v163.88,4.88
  Bottom 0.152: IC27.34 142,14.75 v143.75,13 | v163.88,4.88 165.38,4.88 172.38,11.88 175.38,11.88 RN2.17
DATAA0  (via drill 0.35)
  Top 0.152: v10.62,137.5 9,137.5 OUT1.1 | v25.38,137.5 26.88,137.5 OUT2.1 | 10.5,117.5 13.62,117.5 15.75,119.62 25.75,119.62 27.88,117.5 OUT4.1 28,117.5 30.38,117.5 v34.25,121.38 | 10.5,117.5 10,117.5 OUT3.1 10.5,117.5 | 10.5,117.5 v10.5,118.88
  Bottom 0.152: v25.38,137.5 24.88,138 17.25,138 16.75,137.5 v10.62,137.5 10.62,137.12 8.38,134.88 8.38,121 v10.5,118.88 | v34.25,121.38 39.75,115.88 39.75,114 39.5,113.75 39.5,111.5 44.25,106.75 44.25,106 46.88,103.38 46.88,103 52,97.88 64.75,97.88 65.5,98.62 71,98.62 BANKA.1
DATAA1  (via drill 0.35)
  Top 0.152: v10.62,136.25 9,136.25 OUT1.2 | v22.88,136.12 26.88,136.12 OUT2.2 | 34.88,121.62 34.5,122 34,122 32.75,120.75 v16,120.75 11,120.75 8.25,118 8.25,116.88 8.88,116.25 9.88,116.25 OUT3.2 | 34.88,121.62 34.88,121.12 30,116.25 28,116.25 OUT4.2 | v69.5,100.12 69.5,112.5 v68.38,113.62 | v56.5,113.38 v61,113.38 | v45.62,123.25 36.5,123.25 34.88,121.62
  Bottom 0.152: v10.62,136.25 11.5,136.25 11.62,136.38 16,136.38 | 16,136.38 22.62,136.38 v22.88,136.12 | v69.5,100.12 70.62,101.25 71,101.25 BANKA.2 | v68.38,113.62 65.25,113.62 65,113.88 63.38,113.88 62.88,113.38 v61,113.38 | v56.5,113.38 56.12,113.38 51.88,117.62 51.88,118.62 50.5,120 48.88,120 v45.62,123.25 | v16,120.75 16,136.38
DATAA2  (via drill 0.35)
  Top 0.152: v14.5,115 10,115 OUT3.3 | v26.25,115 27.88,115 OUT4.3 28,114.88 v29.5,114.88 | v7.38,134.88 8.88,134.88 OUT1.3 | v19.12,138.62 22.75,135 26.88,135 OUT2.3
  Bottom 0.152: v26.25,115 25.5,115.75 19.88,115.75 19.12,115 v14.5,115 13.5,115 8,120.5 8,132.88 7.38,133.5 v7.38,134.88 7.38,135.12 10.88,138.62 v19.12,138.62 | v29.5,114.88 31.62,114.88 49,97.5 71.25,97.5 72.38,98.62 73.62,98.62 BANKA.3
DATAA3  (via drill 0.35)
  Top 0.152: v7,131.25 7,116.12 9.38,113.75 9.88,113.75 OUT3.4 | v7,133 7.38,133 8,133.62 8.88,133.62 OUT1.4 | 20.88,97 19.38,98.5 v19.38,107.12 | 20.88,97 23.12,94.75 23.12,91 IC8.1 | 74.75,96.25 74.75,100.25 73.75,101.25 BANKA.4 | 74.75,96.25 74.75,94 76.88,91.88 77.38,91.88 83.88,85.38 91.12,85.38 93.25,83.25 93.25,83 93.38,82.88 95.62,82.88 96.75,81.75 105.88,81.75 106,81.62 129.88,81.62 131.12,82.88 133.12,82.88 IC10.1 | 20.88,97 26.75,102.88 26.75,103.88 27.25,104.38 v40.75,104.38 | 74.75,96.25 v73.38,96.25
  Bottom 0.152: v7,133 v7,131.25 7,121 19.38,108.62 v19.38,107.12 | v40.75,104.38 41.12,104.38 49.88,95.62 60.25,95.62 61.38,96.75 68,96.75 68.5,96.25 v73.38,96.25
DATAA4  (via drill 0.35)
  Top 0.152: 22,129.5 23.62,129.5 26.38,132.25 26.88,132.25 OUT2.5 | 22,129.5 20.75,129.5 19.12,127.88 14,127.88 13.75,128.12 13.75,128.25 9.75,132.25 9,132.25 OUT1.5 | v46.12,89.38 40.25,89.38 39.25,90.38 39.25,90.88 IC9.1 | v101.12,82.38 105.75,82.38 106.12,82 129.75,82 132,84.25 134.88,84.25 135.12,84 135.12,81.75 135.25,81.62 141.75,81.62 143,82.88 149.12,82.88 IC11.1 | v96.88,86.38 96.88,88.12 95.12,89.88 86.75,89.88 v81.25,95.38 | v79.5,97.12 77.75,97.12 76.25,98.62 BANKA.5 | v22,129.38 22,129.5 | v23.62,115.12 v22,116.75 | v27.25,106.5 31.5,106.5 v31.62,106.62
  Bottom 0.152: BANKA.5 76.12,98.62 76.12,98.12 70.25,92.25 64.62,92.25 61.75,89.38 50.38,89.38 48.5,87.5 48,87.5 v46.12,89.38 44.25,87.5 41.88,87.5 31.5,97.88 31.5,100 31.62,100.12 v31.62,106.62 | v101.12,82.38 101.12,84.38 101,84.5 101,84.62 99.25,86.38 v96.88,86.38 | v79.5,97.12 v81.25,95.38 | v22,116.75 v22,129.38 | v23.62,115.12 23.62,114.75 27,111.38 27,106.75 v27.25,106.5
DATAA5  (via drill 0.35)
  Top 0.152: v135.62,35.38 148.25,48 | v100.25,29.62 v104.25,25.62 | v89.38,28.5 v98.38,28.5 | v80.62,111 80.62,110.38 80,109.75 75.75,109.75 72.12,106.12 72.12,103.62 73,102.75 73.5,102.75 74.88,101.38 76.12,101.38 BANKA.6 | v141.62,86.88 v141.62,94.12 | v144.38,57.88 144.38,57.5 148.25,53.62 148.25,48 | 148.25,48 EXTRA1.K
  Bottom 0.152: v135.62,35.38 122.75,22.5 122.25,22.5 121,21.25 121,19.62 118.88,17.5 108.12,17.5 106.25,19.38 106.25,23.62 v104.25,25.62 | v100.25,29.62 99.5,29.62 v98.38,28.5 | v89.38,28.5 85.88,28.5 76.75,19.38 76.75,18.88 76.12,18.25 72.5,18.25 70.75,20 A7_A5.2 | v80.62,111 81,111 81.12,111.12 89.38,111.12 90.5,110 104.88,110 108.38,106.5 129.38,106.5 139.5,96.38 139.88,96.38 141.62,94.62 v141.62,94.12 | v141.62,86.88 144.38,84.12 v144.38,57.88
DATAA6  (via drill 0.35)
  Top 0.152: v143.75,53.12 139.5,57.38 139.38,57.38 137.25,59.5 137.25,60 133.25,64 v128.38,64 | v109.12,93.38 105.25,93.38 104.38,92.5 102.5,92.5 v99.75,95.25 | v88.88,97.38 87.38,98.88 87.38,99.12 86.25,100.25 86,100.25 84.75,101.5 84.75,101.75 84.25,102.25 78.38,102.25 77.75,101.62 77.75,99.62 78.62,98.75 BANKA.7 | v90.25,32.88 91.25,31.88 v94.62,31.88 | v102.88,43.75 103.62,43.75 103.88,44 106,44 106.75,43.25 v111.12,43.25 | v122.5,39.12 122.88,39.12 124.75,41 135.12,41 v143.25,49.12
  Bottom 0.152: v128.38,64 128.38,64.38 125.25,67.5 122.5,67.5 115.62,74.38 115.38,74.38 111.38,78.38 111.38,93 111,93.38 v109.12,93.38 | v99.75,95.25 95.25,95.25 93.12,97.38 v88.88,97.38 | EXTRA2.K 154.25,48 154.25,52.88 152.88,54.25 146.5,54.25 145.38,53.12 v143.75,53.12 143.25,52.62 v143.25,49.12 | A7_A5.3 73.75,20 76.12,22.38 76.75,22.38 78.12,23.75 78.12,28.62 82.38,32.88 v90.25,32.88 | v94.62,31.88 95.62,31.88 98.75,35 98.75,38.38 103,42.62 103,43.62 v102.88,43.75 | v111.12,43.25 116.88,43.25 121,39.12 v122.5,39.12
DATAA7  (via drill 0.35)
  Top 0.152: v149.88,58.75 149.88,59.25 150.12,59.5 150.12,60.88 149.12,61.88 147.62,61.88 v143.12,66.38 | v134.12,85.62 131.88,85.62 130.25,84 102.38,84 v101.62,84.75 | v96.25,87.88 94.5,87.88 92.88,89.5 86.25,89.5 80.12,95.62 76.88,95.62 76.62,95.38 | 76.62,95.38 76.12,95.38 75.75,95.75 75.75,96.25 76.12,96.62 79.12,96.62 79.25,96.5 79.75,96.5 80.12,96.88 80.12,99.88 BANKA.8 | v79.75,28.38 76.88,31.25 69.38,31.25 67.25,33.38 67.25,38.38 64.88,40.75 64.88,46.12 65.88,47.12 65.88,56.88 v65.62,57.12 | 76.62,95.38 v76.62,95
  Bottom 0.152: v149.88,58.75 151.88,58.75 160.25,50.38 160.25,48 EXTRA3.K | v143.12,66.38 143.12,84 143.25,84.12 143.25,84.62 142,85.88 134.38,85.88 v134.12,85.62 | v101.62,84.75 101.38,84.75 99.25,86.88 97.25,86.88 v96.25,87.88 | v79.75,28.38 78.75,27.38 78.75,23.88 75.88,21 75.88,20 A7_A5.4 | v65.62,57.12 66.88,58.38 66.88,64.25 65.25,65.88 65.25,83.38 64.5,84.12 64.5,85.88 67.25,88.62 70.25,88.62 v76.62,95
DATAA8  (via drill 0.35)
  Top 0.152: v149.5,59.75 148.38,60.88 140.88,60.88 137.12,64.62 v121.38,64.62 | 102.25,74.38 96.62,74.38 95.88,75.12 92.25,75.12 91.75,75.62 91.75,81.62 90.5,82.88 88.12,82.88 87.12,83.88 83.88,83.88 80.88,86.88 v80.5,86.88 | A11_A8.1 77.88,20 72.5,25.38 64.5,25.38 58.25,31.62 58.25,34.5 59.38,35.62 59.38,43.75 v59.88,44.25 | v64.25,69.38 69.5,69.38 72.25,66.62 v78.5,66.62 | v87.88,71.38 90,71.38 91.75,73.12 93.25,73.12 93.62,72.75 101.88,72.75 102.25,73.12 102.25,74.38 | 102.25,74.38 v102.62,74.38
  Bottom 0.152: EXTRA4.A 163.12,48 151.38,59.75 v149.5,59.75 | v121.38,64.62 111.62,74.38 v102.62,74.38 | v80.5,86.88 80.5,93.75 81.88,95.12 81.88,98.12 BANKA.9 | v59.88,44.25 59.88,57.88 59.75,58 59.75,60.38 64.25,64.88 v64.25,69.38 | v78.5,66.62 81.75,66.62 86.5,71.38 v87.88,71.38
DATAA9  (via drill 0.35)
  Top 0.152: 64.62,59 A_CLEAR_LED.K | 64.62,59 66.25,57.38 66.25,46.62 71.12,41.75 71.12,39.75 72.38,38.5 72.38,37.88 73.62,36.62 73.62,34.75 76.12,32.25 78.38,32.25 82.62,28 82.62,20 A11_A8.2 | v86.88,96.5 85.38,98 85.38,98.5 84.12,99.75 84,99.75 82.5,101.25 81.38,101.25 BANKA.10 | v78.12,81.62 77.75,81.62 77.62,81.75 74.62,81.75 71.5,78.62 v71.5,77.25 | 64.62,59 v68.5,62.88
  Bottom 0.152: v86.88,96.5 86.88,91.25 85.88,90.25 85.88,86.62 80.88,81.62 v78.12,81.62 | v71.5,77.25 69.5,77.25 68.5,76.25 v68.5,62.88
DATAA10  (via drill 0.35)
  Top 0.152: v67.12,44.88 v66,46 | v69.12,45.62 70.25,45.62 71.75,47.12 76.38,47.12 77.75,45.75 79.12,45.75 79.5,46.12 82.88,46.12 v85.88,43.12 86.5,42.5 86.5,39.12 87.38,38.25 87.38,33.62 88.88,32.12 v88.88,29.88 | v79.88,78.12 v79.88,82.88 | v87.88,45.12 v89.25,46.5
  Bottom 0.152: v66,46 64.38,47.62 64.38,48 B_CLEAR_LED.K | v67.12,44.88 68.38,44.88 v69.12,45.62 | v88.88,29.88 90.12,28.62 90.12,24.75 85.38,20 A11_A8.3 | v79.88,82.88 79.88,83.75 81.12,85 81.12,92.88 83.75,95.5 83.75,98.62 BANKA.11 | v79.88,78.12 80.25,78.12 82,76.38 84.38,76.38 95.38,65.38 95.38,53.62 89.25,47.5 v89.25,46.5 | v85.88,43.12 v87.88,45.12
DATAA11  (via drill 0.35)
  Top 0.152: v38.75,43.5 39.5,44.25 45,44.25 47.75,47 47.75,49.38 51.38,53 v51.38,55.5 | v62.38,88.12 62.38,94.75 62.62,95 62.62,99 v65.38,101.75 | A11_A8.4 87.38,20 85.25,22.12 v84.38,22.12 | v81,22.12 77.38,22.12 v76.5,23 | v72.62,23 71.25,23 71.12,22.88 67.88,22.88 67.25,23.5 63.62,23.5 58,29.12 v56.62,29.12 | v50.75,31.75 50,32.5 39.5,32.5 v37.75,34.25
  Bottom 0.152: C_CLEAR_LED.K 34.62,36 36.38,34.25 36.88,34.25 37.25,34.62 37.25,34.75 | 37.25,34.75 37.25,36.38 36.88,36.75 36.88,41.62 v38.75,43.5 | v51.38,55.5 54.75,55.5 57.25,58 57.25,78.5 62.25,83.5 62.25,88 v62.38,88.12 | v65.38,101.75 66.25,101.75 69.75,105.25 74.62,105.25 77.62,102.25 82.88,102.25 83.75,101.38 BANKA.12 | v81,22.12 v84.38,22.12 | v72.62,23 v76.5,23 | v56.62,29.12 53.38,29.12 v50.75,31.75 | 37.25,34.75 v37.75,34.25
DATAA12  (via drill 0.35)
  Top 0.152: 76.75,38.88 76.38,38.5 76.38,37.88 78.25,36 D_CLEAR_LED.K | 76.75,38.88 77.62,38.88 77.88,38.62 78.12,38.62 v80.5,36.25 | v81.75,35 81.75,31.62 92.12,21.25 92.12,20 A15_A12.1 | v79.12,82.25 79.12,81.25 77.75,79.88 77.75,79.5 77.62,79.38 v74.75,79.38 | v76.38,41.38 76.38,39.25 76.75,38.88
  Bottom 0.152: v81.75,35 v80.5,36.25 | v79.12,82.25 81,82.25 85.5,86.75 85.5,90.38 86.25,91.12 86.25,98.62 BANKA.13 | v74.75,79.38 74.75,75.88 74.12,75.25 74.12,70.75 76.62,68.25 76.62,41.62 v76.38,41.38
DATAA13  (via drill 0.35)
  Top 0.152: v107,43.88 v107,45.62 | v97.75,65.62 v97.75,67.62
  Bottom 0.152: 106.75,52.12 117.38,52.12 124.25,59 RESET_INERUPT1.K | 106.75,52.12 106.38,51.75 106.38,46.25 v107,45.62 | v107,43.88 107,40.75 107.12,40.62 107.12,40.12 104.5,37.5 104.5,31.38 94.75,21.62 94.75,20 A15_A12.2 | v97.75,67.62 95.5,67.62 93.5,69.62 93.5,75.62 92.75,76.38 92.25,76.38 91.88,76 91.88,75.62 91.38,75.12 87.5,75.12 85.5,77.12 85.5,81.12 86.25,81.88 86.25,90.12 87.5,91.38 87.5,99 86.38,100.12 86.38,101.25 BANKA.14 | v97.75,65.62 97.75,64 106.75,55 106.75,52.12
DATAA14  (via drill 0.35)
  Top 0.152: v119.88,85 118.5,85 115.12,88.38 106,88.38 v105.75,88.12 | v104.12,89.75 102.62,89.75 v96.12,96.25 | v98.5,26.25 98.75,26 98.75,23.38 97.38,22 97.38,20 A15_A12.3 | v105.5,33.25 v103.88,31.62 | v113.5,38.25 113.5,38.88 118.88,44.25 v118.88,44.62 | v122.62,44.62 123,44.62 124.75,46.38 126.62,46.38 128.75,48.5 128.75,50 v130.5,51.75
  Bottom 0.152: 136.25,59 122.38,72.88 122.38,82.5 v119.88,85 | v104.12,89.75 v105.75,88.12 | v96.12,96.25 94.75,96.25 93.25,97.75 89.88,97.75 89,98.62 BANKA.15 | v98.5,26.25 98.88,26.25 103.88,31.25 v103.88,31.62 | v105.5,33.25 106.38,33.25 109.5,36.38 111.62,36.38 v113.5,38.25 | v122.62,44.62 v118.88,44.62 | v130.5,51.75 130.5,52.12 136.25,57.88 136.25,59 | 136.25,59 PAUSE_INERUPT.K
DATAA15  (via drill 0.35)
  Top 0.152: v120.5,35.38 120.5,38 123.88,41.38 135,41.38 138.38,44.75 138.38,45.25 130.38,53.25 130.38,59 PLAY_INTERUPT.K | v95,96.88 95,93 100.5,87.5 108,87.5 108.5,88 114.62,88 v117.5,85.12
  Bottom 0.152: v120.5,35.38 119.38,35.38 119.12,35.12 109.75,35.12 99.88,25.25 99.88,20 A15_A12.4 | v95,96.88 95,99.12 94.38,99.75 91.5,99.75 90,101.25 89,101.25 BANKA.16 | v117.5,85.12 117.5,79.62 117.12,79.25 117.12,75.88 125.12,67.88 125.38,67.88 130.25,63 130.25,59 PLAY_INTERUPT.K
DATAB0  (via drill 0.35)
  Top 0.152: v51.25,118.38 51.88,118.38 52.38,117.88 52.38,117 52.25,116.88 47.88,116.88 47.38,117.38 45,117.38 IC21.1 | v72.75,105.88 72.75,104.5 72.5,104.25 72.5,103.75 73.12,103.12 85.88,103.12 87.88,101.12 87.88,100.88 89,99.75 90.38,99.75 91.38,98.75 BANKB.1
  Bottom 0.152: v51.25,118.38 51.25,117.75 60.62,108.38 70.25,108.38 v72.75,105.88
DATAB1
  Top 0.152: IC21.2 45,116.12 49.38,116.12 50,115.5 52.12,115.5 54.62,118 54.62,118.75 55.38,119.5 66,119.5 66.12,119.38 66.62,119.38 66.75,119.5 69.38,119.5 70.88,118 74.5,118 91.12,101.38 91.38,101.38 BANKB.2
DATAB2  (via drill 0.35)
  Top 0.152: v62.5,109.12 62.25,108.88 55,108.88 52.12,111.75 50,111.75 46.88,114.88 45,114.88 IC21.3 | v91.75,102.88 93,101.62 93,99.62 93.88,98.75 BANKB.3
  Bottom 0.152: v62.5,109.12 62.88,109.12 63.25,108.75 71.62,108.75 77.5,102.88 v91.75,102.88
DATAB3  (via drill 0.35)
  Top 0.152: v46.25,136.38 45.25,137.38 44,137.38 IC22.1 | v91.75,104.38 91.75,103.75 93.88,101.62 93.88,101.38 BANKB.4
  Bottom 0.152: v46.25,136.38 46.25,131.25 46.88,130.62 46.88,124.62 60.5,111 63.25,111 64.75,109.5 71.88,109.5 77.38,104 91.38,104 v91.75,104.38
DATAB4  (via drill 0.35)
  Top 0.152: v42.38,136.25 43.88,136.25 IC22.2 | v92.12,105.62 93.5,105.62 97.5,101.62 97.5,99.62 96.62,98.75 BANKB.5
  Bottom 0.152: v42.38,136.25 44.75,136.25 45.88,137.38 46.62,137.38 47.62,136.38 47.62,125.25 56,116.88 56.88,116.88 58.75,115 58.75,114.25 60.88,112.12 63.62,112.12 65.12,110.62 72.25,110.62 77.75,105.12 89.88,105.12 90.38,105.62 v92.12,105.62
DATAB5  (via drill 0.35)
  Top 0.152: v45.5,135.75 44.75,135 44,135 IC22.3 | v92.88,105 96.5,101.38 BANKB.6
  Bottom 0.152: v45.5,135.75 45.5,136.5 46,137 46.5,137 47.25,136.25 47.25,124.75 60.62,111.38 63.38,111.38 64.88,109.88 72,109.88 77.5,104.38 90.88,104.38 91.5,105 v92.88,105
DATAB6  (via drill 0.35)
  Top 0.152: v8,28.88 8,37.62 9.75,39.38 10.25,39.38 10.62,39 10.62,38.5 9.38,37.25 9.38,36 C_IN.K | v43,2.25 68.5,2.25 69.25,3 69.25,5 68.5,5.75 66.75,5.75 62.25,10.25 62.25,10.88 63.62,12.25 | 63.62,12.25 67.25,15.88 67.25,16.12 67.88,16.75 71.5,16.75 73.25,15 B7_B6.3 | v102.88,90.38 99.12,94.12 99.12,98.62 BANKB.7 | v101,67.62 98.75,65.38 98.75,65.25 95.88,62.38 v94.38,62.38 | v78.75,50.25 75.5,50.25 72.75,47.5 68.88,47.5 v68.25,46.88 | v64.25,42.88 64.25,40.75 64.5,40.5 64.5,38.75 62.75,37 62.75,29 64.38,27.38 v64.88,27.38 | v60.88,22.62 60.88,21.38 62.88,19.38 62.88,16.62 v61.12,14.88 | 63.62,12.25 v63.62,11.88
  Bottom 0.152: v8,28.88 8,28.25 4.75,25 4.75,11 13.5,2.25 v43,2.25 | v102.88,90.38 102.88,85.12 101.75,84 101.75,79.25 102.25,78.75 102.25,74.88 101,73.62 v101,67.62 | v94.38,62.38 94.38,61.12 92.62,59.38 92.62,57.25 88.62,53.25 87.62,53.25 84.62,50.25 v78.75,50.25 | v64.25,42.88 v68.25,46.88 | v64.88,27.38 64.88,26.62 v60.88,22.62 | v61.12,14.88 61.12,14.38 v63.62,11.88
DATAB7  (via drill 0.35)
  Top 0.152: v44.88,33.12 51.25,33.12 64.88,19.5 v64.88,18.38 | v87,107.62 87.5,107.12 94,107.12 97.75,103.38 97.75,103 99,101.75 99,101.38 BANKB.8 | v68.75,112.38 68.75,108.5 v64.62,104.38 | v62,103.12 61.62,102.75 61.5,102.75 52.25,93.5 52.25,93 50.62,91.38 50.62,88.62 v50.88,88.38 | v34.75,62 34.75,53.5 37.25,51 37.25,50.5 35,48.25 35,45.88 39.38,41.5 42.62,41.5 v43.88,40.25
  Bottom 0.152: v44.88,33.12 42.75,35.25 | 42.75,35.25 42.38,35.62 42.38,36 D_IN_L.K 42.75,35.25 | v64.88,18.38 64.88,17.88 64.62,17.62 64.62,17.12 65,16.75 74,16.75 75.75,15 B7_B6.4 | v87,107.62 86.62,107.62 85.62,106.62 78.25,106.62 72.5,112.38 v68.75,112.38 | v64.62,104.38 63.25,104.38 v62,103.12 | v50.88,88.38 50.38,88.38 39.88,77.88 39.88,67.12 v34.75,62 | v43.88,40.25 43.88,39.5 45.12,38.25 45.12,37.62 42.75,35.25
DATAB8  (via drill 0.35)
  Top 0.152: B11_B8.1 80.12,15 77.62,17.5 68.62,17.5 67.25,18.88 67.25,19.38 59.88,26.75 58.12,26.75 48.88,36 D_IN_H.K 48.25,36 46.62,34.38 45.38,34.38 44.75,35 44.75,37 45.38,37.62 46.5,37.62 47.88,39 49,39 51.25,41.25 v54,41.25 | v87,81.25 87,80.75 87.12,80.62 87.12,78 86.75,77.62 86.75,72.12 86.38,71.75 86.38,68 v88.25,66.12 | v80,62.25 77.25,62.25 75.88,63.62 73.12,63.62 v67.5,58 | v65.25,55.75 65.25,51 62.62,48.38 62.62,46.88 62.12,46.38 59.12,46.38 v55.25,42.5
  Bottom 0.152: v87,81.25 87,83 98.62,94.62 100,94.62 101.5,96.12 101.5,98.62 BANKB.9 | v88.25,66.12 83.88,66.12 v80,62.25 | v65.25,55.75 v67.5,58 | v54,41.25 v55.25,42.5
DATAB9  (via drill 0.35)
  Top 0.152: v23.75,15.5 28.62,15.5 v29.5,14.62 | v69.75,5.5 70.12,5.5 70.38,5.75 83.12,5.75 86.25,8.88 86.25,11.38 85.38,12.25 | 85.38,12.25 82.62,15 B11_B8.2 | v104.12,93.12 103.12,94.12 103.12,98.62 101.62,100.12 101.62,101.25 BANKB.10 | v109.75,73.75 v109.75,75 | v111.25,69.25 111.25,67.25 v110.62,66.62 | v116.5,60.75 116.5,52.88 118.5,50.88 118.5,45.12 116,42.62 v116,42.25 | v95.12,18 95.12,17.5 93.75,16.12 93.75,12.75 93.38,12.38 89.25,12.38 v89,12.62 | 85.38,12.25 v85.75,12.62
  Bottom 0.152: X_IN.K 8.75,24 16,16.75 22.5,16.75 v23.75,15.5 | v29.5,14.62 29.5,11.25 33.12,7.62 67.62,7.62 67.75,7.75 68.25,7.75 69.75,6.25 v69.75,5.5 | v104.12,93.12 104.12,90.62 106.38,88.38 106.38,80.88 106.12,80.62 106.12,78.62 v109.75,75 | v109.75,73.75 110.75,73.75 111.25,73.25 v111.25,69.25 | v116.5,60.75 v110.62,66.62 | v116,42.25 116,41.75 120.12,37.62 120.12,37.12 118.88,35.88 109.5,35.88 95.75,22.12 95.75,18.62 v95.12,18 | v85.75,12.62 v89,12.62
DATAB10  (via drill 0.35)
  Top 0.152: v60,18.62 59,19.62 54.75,19.62 50.38,24 IR_IN.K | v75,13.25 v65.5,13.25 | v94.12,70.75 94.12,70.5 93.5,69.88 93.5,69.5 88,64 88,61.25 89.25,60 89.25,56.75 87.88,55.38 v87.88,52.62 | v82.62,45.5 82.62,37.5 80,34.88 v80,32.62
  Bottom 0.152: 61.62,17 63.88,14.75 63.88,14.5 65.12,13.25 v65.5,13.25 | 61.62,17 v60,18.62 | v75,13.25 76.12,13.25 79.62,16.75 83.5,16.75 85.25,15 B11_B8.3 | v94.12,70.75 94.12,75.5 93.5,76.12 93.5,86 98.38,90.88 98.38,91.38 104.12,97.12 104.12,98.62 BANKB.11 | v87.88,52.62 87.5,52.62 84.5,49.62 81.88,49.62 81.38,49.12 81.38,46.75 v82.62,45.5 | v80,32.62 76.75,29.38 75.88,29.38 69.38,22.88 67.5,22.88 61.62,17
DATAB11  (via drill 0.35)
  Top 0.152: v48.5,12.25 48.5,12.75 53.25,17.5 61.25,17.5 v62.25,18.5 | v69.75,26 72.62,26 76.88,21.75 80.5,21.75 81.75,20.5 81.75,18.88 83.88,16.75 v86,16.75 | v97.5,84.38 v97.5,87.5 | v94.25,69.75 88.62,64.12 v88.62,61.88
  Bottom 0.152: v48.5,12.25 46.62,10.38 43,10.38 41.75,9.12 40.5,9.12 40.38,9.25 35,9.25 33.38,10.88 33.38,12.62 22.38,23.62 22.38,24 MAR_IN.K | v69.75,26 68.75,25 | 68.75,25 v62.25,18.5 | v86,16.75 87.75,15 B11_B8.4 | v97.5,87.5 96.88,88.12 96.88,88.75 98.75,90.62 98.75,91.25 105.12,97.62 105.12,99.12 104.25,100 104.25,101.25 BANKB.12 | v97.5,84.38 97.5,81.25 97.75,81 97.75,71.12 96.38,69.75 v94.25,69.75 | v88.62,61.88 86.62,61.88 83.25,58.5 83.25,56.12 77.75,50.62 77.75,47.5 79,46.25 79,41.38 79.38,41 79.38,33.75 70.5,24.88 70.5,24.5 70.12,24.12 69.62,24.12 68.75,25
DATAB12  (via drill 0.35)
  Top 0.152: v98.12,68.88 v94.5,65.25 | v102.38,80.75 v100.62,79 | v84.88,40.25 86.62,38.5 86.62,33.88 87.38,33.12 87.38,32 87.25,31.88 87.25,26.62 88.25,25.62 88.62,25.62 93.25,21 93.25,19 92.25,18 92.25,15 B15_B12.1 | v79.62,44.88 75.38,44.88 v73.75,46.5 | v71.88,53.5 75.75,57.38 80.62,57.38 82.25,59 PC_IN.K
  Bottom 0.152: PC_IN.K 83.25,59 86.75,62.5 91.75,62.5 v94.5,65.25 | v98.12,68.88 98.12,76.5 v100.62,79 | v102.38,80.75 102.38,84.12 103.5,85.25 103.5,95.5 106.62,98.62 BANKB.13 | v84.88,40.25 84.12,41 82.12,41 81.88,40.75 81.12,40.75 80.25,41.62 80.25,44.25 v79.62,44.88 | v73.75,46.5 73.75,51.62 v71.88,53.5
DATAB13  (via drill 0.35)
  Top 0.152: v88.62,51.25 96.88,51.25 97.75,50.38 100.12,50.38 100.75,51 v101,51 | v93.5,26.62 93.88,26.62 95.75,24.75 95.75,16 94.75,15 B15_B12.2 | v107.88,81 107.88,80.62 104.75,77.5 v101.25,77.5 | v95.75,68.25 95,68.25 90.38,63.62 90.38,56.62 v91.62,55.38
  Bottom 0.152: STACK_IN.K 83.75,48 87,51.25 v88.62,51.25 91.62,54.25 v91.62,55.38 | v101,51 101,50.62 103.5,48.12 103.5,42.62 99.12,38.25 99.12,32.25 v93.5,26.62 | v107.88,81 107.88,98.88 106.75,100 106.75,101.25 BANKB.14 | v101.25,77.5 101.25,74.88 98.75,72.38 98.75,68.62 98.38,68.25 v95.75,68.25
DATAB14  (via drill 0.35)
  Top 0.152: v35.5,9.88 35.5,8.25 v38.62,5.12 | v86.38,2.5 87.25,2.5 87.5,2.25 88.12,2.25 90.88,5 90.88,5.25 92.5,6.88 v92.88,6.88 | v113.5,87.38 114.38,87.38 117.38,84.38 123.12,84.38 v123.38,84.62 | v127,81 131.38,81 139.75,72.62 v143.75,72.62 | v139.62,48.38 v139.62,51.25 | v117.25,32.62 v126.38,32.62 | v104,28 102.75,28 v101.25,29.5 | v99.12,27.38 99.12,21.38 98.62,20.88 98.62,16.25 97.38,15 B15_B12.3
  Bottom 0.152: v35.5,9.88 35.5,12.75 30.38,17.88 30.38,24 RAM_IN_L.K | v38.62,5.12 41,5.12 44.75,1.38 85.25,1.38 v86.38,2.5 | v92.88,6.88 92.88,8.62 93.75,9.5 93.75,11.5 97.25,15 B15_B12.3 | v113.5,87.38 113.75,87.62 113.75,93 109.25,97.5 109.25,98.62 BANKB.15 | v127,81 v123.38,84.62 | v143.75,72.62 143.75,55.38 v139.62,51.25 | v139.62,48.38 130.62,39.38 130.62,36.88 v126.38,32.62 | v117.25,32.62 108.62,32.62 v104,28 | v99.12,27.38 v101.25,29.5
DATAB15  (via drill 0.35)
  Top 0.152: RAM_IN_H.K 35.75,24 33.5,26.25 v26.75,26.25 | v5.88,50.88 5.88,51.88 1.5,56.25 1.5,72.38 2.62,73.5 2.62,99.75 1.12,101.25 1.12,140.62 10.75,150.25 50,150.25 70.5,129.75 71,129.75 72.5,128.25 72.5,127.25 74.5,125.25 74.62,125.25 77.25,122.62 77.25,118.12 84.38,111 84.38,109.12 87.25,106.25 94,106.25 v97.12,103.12 | v106,102.5 108,102.5 109.12,101.38 BANKB.16 | v98.62,39.25 96.75,37.38 96.75,35 97.25,34.5 97.25,31.75 102.38,26.62 102.38,19.5 99.88,17 99.88,15 B15_B12.4 | v100,51.12 100,51.75 102.38,54.12 102.38,57.62 110.75,66 110.88,66 115.62,70.75 v115.62,75
  Bottom 0.152: v26.75,26.25 26.38,26.25 25.38,27.25 15,27.25 10.25,32 10.25,37 4.75,42.5 4.75,49.25 5.88,50.38 v5.88,50.88 | v97.12,103.12 98.38,103.12 98.62,103.38 105.12,103.38 v106,102.5 | v98.62,39.25 98.62,40.75 103.12,45.25 103.12,48 v100,51.12 | v115.62,75 115.62,77.25 116.25,77.88 116.25,85.38 117.75,86.88 117.75,95.88 115.25,98.38 115.25,101.75 114.75,102.25 110.12,102.25 109.25,101.38 BANKB.16
DATAC0  (via drill 0.35)
  Top 0.152: v60.88,16.88 v50.25,6.25 | v64.25,28.38 64.25,34.5 65.38,35.62 65.38,37.38 v66.38,38.38 | v75.38,41.25 76.12,42 76.62,42 77.25,41.38 77.25,40.38 77.62,40 79.75,40 v80,40.25 | v89.75,41.62 90.88,41.62 91.12,41.38 95.12,41.38 96.25,40.25 99,40.25 103.25,36 103.25,30.62 109.38,24.5 v109.38,22.38 | v113.5,79.25 113.5,76.12 v110.5,73.12 | v110.62,70 110.62,68.62 101.25,59.25 101.25,57.25 96.5,52.5 v90.75,52.5
  Bottom 0.152: ALU0.K 7.75,12 13.62,6.12 48.5,6.12 49,5.62 49.62,5.62 v50.25,6.25 | v60.88,16.88 59.38,18.38 59.38,22.25 64.25,27.12 v64.25,28.38 | v66.38,38.38 68.25,38.38 68.62,38.75 70.38,38.75 71.88,40.25 71.88,40.62 72.5,41.25 v75.38,41.25 | v80,40.25 80.62,40.25 81.38,39.5 88,39.5 89.75,41.25 v89.75,41.62 89.75,44.12 87.38,46.5 87.38,49.12 v90.75,52.5 | v109.38,22.38 110.38,22.38 112.75,20 LOGIC_OP.4 | BANKC.1 111.75,95.5 114.12,93.12 114.12,79.88 v113.5,79.25 | v110.5,73.12 110.5,72.62 110.62,72.5 v110.62,70
DATAC1  (via drill 0.35)
  Top 0.152: v49.25,6.25 49.25,7 58.25,16 v58.25,16.88 | v70.62,33.25 70.62,38.88 v70.12,39.38 | v76,44.25 80.75,44.25 v81.5,43.5 | v89,42.25 90.75,42.25 91.25,41.75 93.75,41.75 95.5,43.5 98.62,43.5 101.75,40.38 v102.62,40.38 | v106.5,40.38 108.88,40.38 110.38,38.88 110.38,20 LOGIC_OP.3 | BANKC.2 111.75,100.12 110.75,99.12 v110.75,92.75 | v118.88,69.38 118.88,68.5 108,57.62 108,51.12 105.75,48.88 v104.62,48.88
  Bottom 0.152: ALU1.K 19.75,12 25.25,6.5 49,6.5 v49.25,6.25 | v58.25,16.88 58.25,18.12 57.38,19 57.38,25.12 57.88,25.62 59.25,25.62 59.38,25.5 60,25.5 66.38,31.88 69.25,31.88 v70.62,33.25 | v70.12,39.38 73.12,42.38 74.12,42.38 v76,44.25 | v81.5,43.5 82.38,43.5 83.75,42.12 88.88,42.12 v89,42.25 | v106.5,40.38 105.12,40.38 | 105.12,40.38 v102.62,40.38 | v110.75,92.75 110.75,78.38 118.88,70.25 v118.88,69.38 | v104.62,48.88 104.62,44.25 105.12,43.75 105.12,40.38
DATAC2  (via drill 0.35)
  Top 0.152: ALU2.K 13.75,12 24.12,1.62 70.5,1.62 71.5,2.62 72.5,2.62 74,1.12 100,1.12 105,6.12 105,6.62 105.88,7.5 112.38,7.5 114.38,9.5 114.38,13.5 114.75,13.88 114.75,35.5 116.38,37.12 116.38,39.12 116.88,39.62 117.62,39.62 | 117.62,39.62 118.25,39 118.25,36.62 116.25,34.62 116.25,28.25 116.38,28.12 v116.38,26.38 | v114.25,76.38 114.25,76 110.5,72.25 v110,72.25 | v120,65.12 120,59.38 120.75,58.62 120.75,53 124.62,49.12 124.62,46.88 124.12,46.38 122.5,46.38 117.62,41.5 117.62,39.62
  Bottom 0.152: v116.38,26.38 112.5,26.38 107.75,21.62 107.75,20 LOGIC_OP.2 | v114.25,76.38 115.88,78 115.88,85.5 117.38,87 117.38,94.75 114.38,97.75 114.38,98.62 BANKC.3 | v110,72.25 110,69.62 112.12,67.5 117.62,67.5 v120,65.12
DATAC3  (via drill 0.35)
  Top 0.152: v24.38,17.5 24.38,18.12 26.12,19.88 26.12,26.5 26.5,26.88 56.62,26.88 v57.25,26.25 | v61.12,30.12 61.12,34.88 61.38,35.12 61.38,37.38 v63.38,39.38 | v72.38,48.5 75.75,51.88 80.88,51.88 v81.12,51.62 | v89.25,54.75 96.88,54.75 99,56.88 99,60.25 110,71.25 110.5,71.25 117.25,78 118.12,78 118.25,78.12 | 118.25,78.12 119,78.88 119,80 118.38,80.62 v114.88,80.62 | v120.12,34.38 120.12,34.88 119.88,35.12 119.88,36.88 120.12,37.12 120.12,38.12 123.88,41.88 126,41.88 v128.25,44.12 | v123.5,75.5 120.88,75.5 118.25,78.12
  Bottom 0.152: v24.38,17.5 24.38,12 ALU3.K | v61.12,30.12 v57.25,26.25 | v63.38,39.38 65.75,39.38 72.62,46.25 72.62,48.25 v72.38,48.5 | v81.12,51.62 85.5,51.62 88.62,54.75 v89.25,54.75 | v114.88,80.62 114.88,90.5 114.5,90.88 114.5,97.12 113.25,98.38 113.25,100.25 114.25,101.25 BANKC.4 | v120.12,34.38 117.75,32 109.75,32 103.62,25.88 103.62,25.38 105.12,23.88 105.12,20 LOGIC_OP.1 | v128.25,44.12 128.25,44.5 131.38,47.62 131.38,49.75 137.88,56.25 137.88,59.88 126.88,70.88 125.38,70.88 123.5,72.75 v123.5,75.5
DATAC4  (via drill 0.35)
  Top 0.152: PC_DEC.A 92.25,59 93.88,60.62 98.88,60.62 109.88,71.62 110.38,71.62 117.12,78.38 118,78.38 118.38,78.75 v118.38,79.75 | v64.88,14.88 65.25,14.88 66.12,15.75 v66.12,18 | v78.75,28.38 v77.12,28.38 | v82.62,32.25 82.62,37 83.25,37.62 v83.25,44
  Bottom 0.152: v118.38,79.75 118.38,86.38 118.5,86.5 118.5,96.75 116.88,98.38 116.88,98.62 BANKC.5 | v64.88,14.88 65.25,14.88 68.12,12 68.12,10 C7-C4.1 | v66.12,18 68.25,18 69.75,19.5 69.75,21.12 70.38,21.75 70.5,21.75 v77.12,28.38 | v82.62,32.25 v78.75,28.38 | v83.25,44 80.88,46.38 79.38,46.38 78.12,47.62 78.12,50.5 85,57.38 88.62,57.38 90.38,59.12 90.38,60.88 90.75,61.25 91.25,61.25 91.62,60.88 91.62,59 PC_DEC.A
DATAC5  (via drill 0.35)
  Top 0.152: v118.38,75.62 118.38,72.75 v103,57.38
  Bottom 0.152: 97.62,56.5 97.62,55 92.62,50 92.62,43.12 92,42.5 92,38.25 89.25,35.5 89.25,35 87.5,33.25 81.5,33.25 77.25,29 76.75,29 71.5,23.75 71.5,23.25 70.38,22.12 67.75,22.12 64.25,18.62 64.25,16.38 70.62,10 C7-C4.2 | 97.62,56.5 97.62,59 PC_INC.A | v118.38,75.62 119.75,77 119.75,79.25 118.88,80.12 118.88,96.88 118.38,97.38 118.38,98.62 116.88,100.12 116.88,101.25 BANKC.6 | v103,57.38 99.5,57.38 98.62,56.5 97.62,56.5
DATAC6  (via drill 0.35)
  Top 0.152: v91,25.12 v92.25,26.38 | v122.25,95.75 119.38,98.62 BANKC.7 | v125.62,71.5 125.62,68.75 v125.38,68.5 | v123.62,56.88 v127,56.88 | v108.62,51.25 105.25,47.88 103.25,47.88 v101.75,46.38
  Bottom 0.152: 97.62,47 97.62,45.25 96.75,44.38 96.75,41.5 97.12,41.12 97.12,39.62 95.25,37.75 95.25,33.38 92.25,30.38 v92.25,26.38 | 97.62,47 97.62,48 STACK_INC.A 97.62,47 | v91,25.12 91,21.38 88.75,19.12 88.75,13.88 88.12,13.25 76.62,13.25 73.38,10 C7-C4.3 | v122.25,95.75 122.25,91.62 124.5,89.38 124.5,86.62 122.75,84.88 122.75,83.12 124.38,81.5 124.38,72.75 v125.62,71.5 | v125.38,68.5 131.25,62.62 131.25,58 130.12,56.88 v127,56.88 | v123.62,56.88 122.62,56.88 117,51.25 v108.62,51.25 | v101.75,46.38 99.38,46.38 98.75,47 97.62,47
DATAC7  (via drill 0.35)
  Top 0.152: STACK_DEC.A 92.25,48 93.88,46.38 94.62,46.38 v95.5,47.25 | v94.38,25.25 92,25.25 91.25,24.5 90.25,24.5 v88.5,26.25 | v77.38,16.88 77.38,11.88 77.62,11.62 77.62,11.12 76.5,10 C7-C4.4 | v123.75,97.12 122.12,97.12 120.88,98.38 120.88,98.62 119.38,100.12 119.38,101.25 BANKC.8 | v125.62,75.12 125.25,75.12 120.88,70.75 117.88,70.75 105,57.88 v105,55.38
  Bottom 0.152: v94.38,25.25 94.38,25.88 101.88,33.38 101.88,40.5 102.38,41 102.62,41 104.75,43.12 104.75,43.62 104.25,44.12 104.25,48.38 104,48.62 104,49.38 101,52.38 97,52.38 95.5,50.88 v95.5,47.25 94.62,46.38 93.88,46.38 93.38,46.88 93.38,49.75 99,55.38 v105,55.38 | v88.5,26.25 84.12,26.25 77.38,19.5 v77.38,16.88 | v123.75,97.12 123.75,91.12 128,86.88 128,77.5 v125.62,75.12
DATAC8  (via drill 0.35)
  Top 0.152: v51.5,22 51.88,22 54.62,19.25 55,19.25 v55.75,18.5 | v65.38,8.88 67.75,6.5 70.75,6.5 72.12,7.88 78,7.88 80.12,10 C11_C8.1 | v119.88,90.12 117,90.12 116.62,90.5 115,90.5 113.25,88.75 100.12,88.75 v97.75,91.12 | v86.5,80.38 84.75,82.12 84.62,82.12 82,84.75 75.62,84.75 v75.38,85 | v76,51.25 72.62,47.88 68.75,47.88 v68,48.62 | v65.25,49.38 65.25,47 64.25,46 59.62,46 55.5,41.88 51.38,41.88 48.88,39.38 47.75,39.38 46.38,38 v44.5,38
  Bottom 0.152: C_INC.A 25.25,36 29,32.25 31.12,32.25 38.75,24.62 38.75,23 39.75,22 43.25,22 | v51.5,22 43.25,22 | v65.38,8.88 v55.75,18.5 | v119.88,90.12 121.25,91.5 121.25,95.62 121.88,96.25 121.88,98.62 BANKC.9 | v97.75,91.12 87,80.38 v86.5,80.38 | v75.38,85 75.38,83 73.5,81.12 73.5,70.88 76.25,68.12 76.25,51.5 v76,51.25 | v68,48.62 66,48.62 v65.25,49.38 | v44.5,38 42.25,38 41.12,36.88 41.12,27.12 43.25,25 43.25,22
DATAC9  (via drill 0.35)
  Top 0.152: v27.25,29.12 24.75,26.62 v24.75,19.38 | v68,7.12 70.88,7.12 72,8.25 76.38,8.25 79.88,11.75 80.88,11.75 82.62,10 C11_C8.2 | v101,102.75 101.38,103.12 124,103.12 125.5,101.62 125.5,100.88 124.88,100.25 124.12,100.25 123.12,101.25 122,101.25 BANKC.10 | v93.88,107.75 v98.88,102.75 | v47.75,138.62 43.38,138.62 39,134.25 39,129 v36.5,126.5 | v36.5,120 36.5,118.12 35.12,116.75 32.88,116.75 31.12,115 v31.12,112 | v42.12,88.12 40.75,88.12 34.5,81.88 v31.88,81.88 | v19.88,49.88 v21.38,51.38